# EAGLE board MB_boomer_amp (EAGLE 9.2.0)
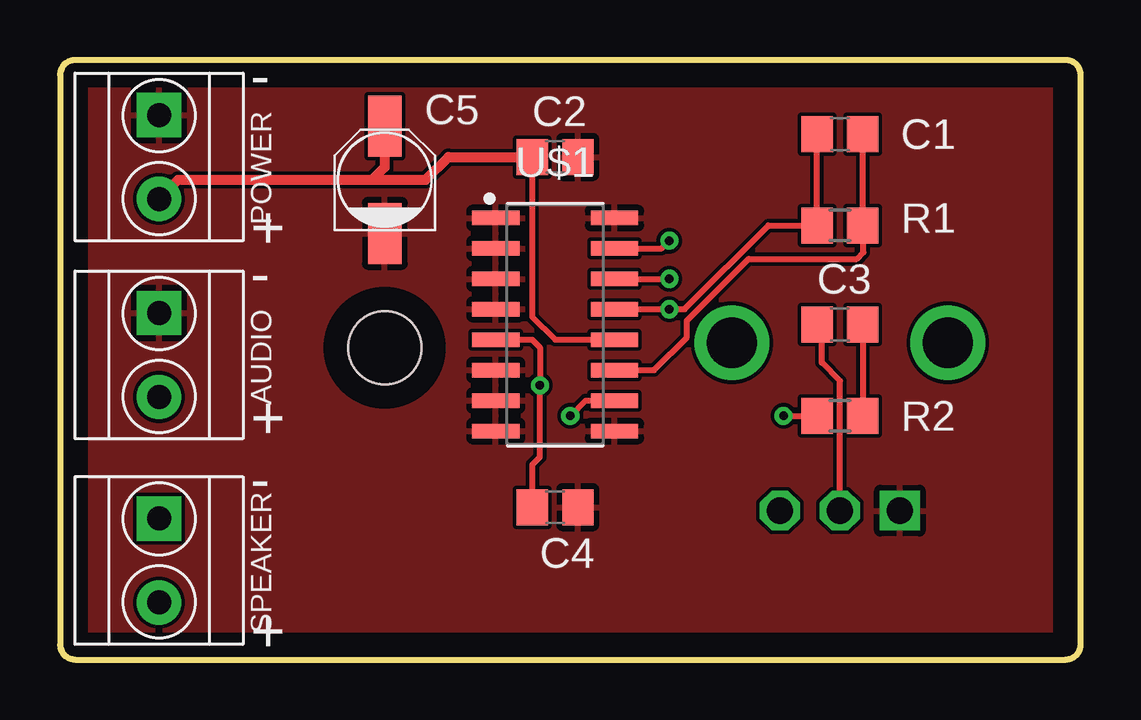
[diagram p0: board, top side]
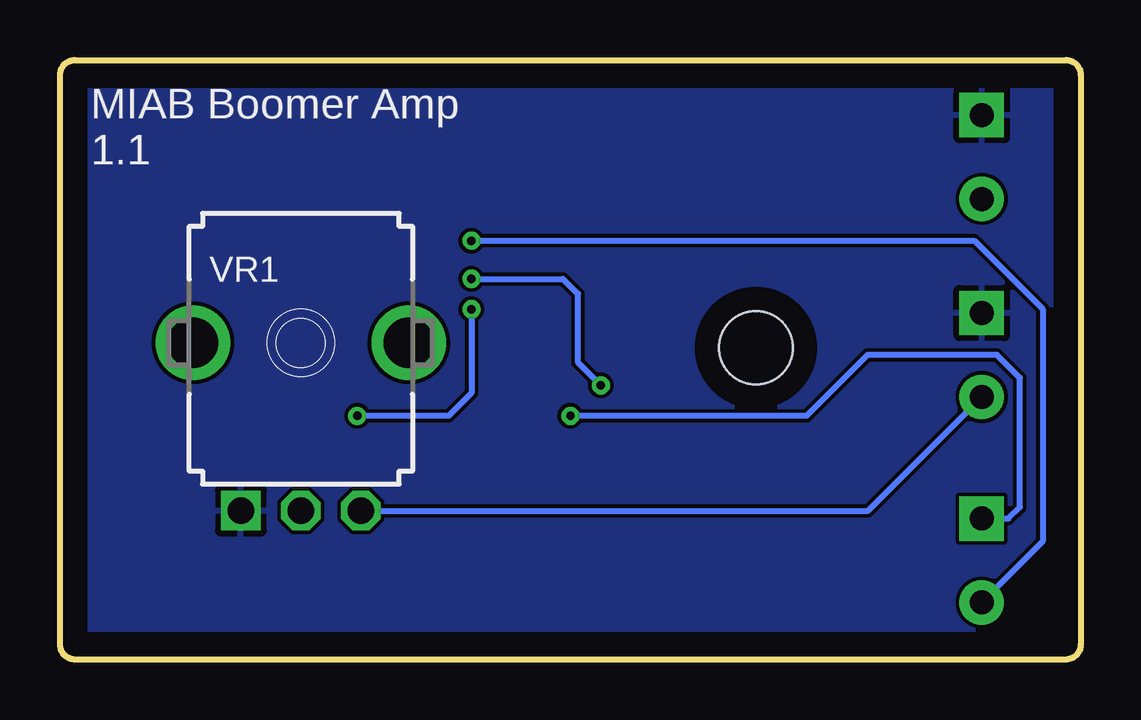
[diagram p1: board, bottom side, seen from below]

Size 42.55 x 25 mm. Coordinates in mm from the lower left corner, seen from the top.
Outline: 0.64,0 41.92,0 arc90 42.55,0.64 42.55,24.36 arc90 41.92,25 0.64,25 arc90 0,24.36 0,0.64 arc90 0.64,0
Copper layers (1*16): Top 0.035mm / dielectric 1.5mm / Bottom 0.035mm
Design rules "default": minimum track width 6mil, minimum drill 0.35mm, track to track 6mil, track to pad 6mil, pad to pad 6mil, via to via 6mil, smd to smd 6mil, copper to edge 40mil, drill to drill 6mil, minimum pad ring 10mil, minimum via ring 8mil, stop-mask expansion 4mil, vias tented up to drill 0mil, thermal gap 10mil
Holes 3.05 mm at 13.54,13

## Footprints (pad centres in the part's own frame; a part is rotated, then mirrored left to right if it is on the bottom)
H2-3.5-7.0X7.0MM = drill 1 pad 1.85 square: 1 -1.75,0 | drill 1 pad 1.85: 2 1.75,0
C0805 = smd 1.3 x 1.5: 1 -0.95,0; 2 0.95,0
PANASONIC_B = smd 2.54 x 1.4: + 2.235,0; - -2.235,0
R0805 = smd 1.3 x 1.5: 1 -0.95,0; 2 0.95,0
SOIC127P600X175-16 = smd 1.968 x 0.602: 1 -2.473,4.445; 2 -2.473,3.175; 3 -2.473,1.905; 4 -2.473,0.635; 5 -2.473,-0.635; 6 -2.473,-1.905; 7 -2.473,-3.175; 8 -2.473,-4.445; 9 2.473,-4.445; 10 2.473,-3.175; 11 2.473,-1.905; 12 2.473,-0.635; 13 2.473,0.635; 14 2.473,1.905; 15 2.473,3.175; 16 2.473,4.445
9MM_SNAP-IN_POT = drill 1.1 square: 1 -2.5,-7 | drill 1.1 octagon: 2 0,-7; 3 2.5,-7 | drill 2.1 pad 2.794: CHASSIS1 -4.5,0; CHASSIS2 4.5,0

## Placement (x,y rotation side)
AUDIO  GREEN-2P-3.5  [H2-3.5-7.0X7.0MM]  4.13,12.7 270 top
C1  5p  [C0805]  32.51,21.91 0 top
C2  100n  [C0805]  20.64,20.95 0 top
C3  4.7u  [C0805]  32.51,13.97 180 top
C4  100n  [C0805]  20.64,6.35 0 top
C5  10u  [PANASONIC_B]  13.54,20 90 top
POWER  GREEN-2P-3.5  [H2-3.5-7.0X7.0MM]  4.13,20.95 270 top
R1  100k  [R0805]  32.51,18.1 180 top
R2  10k  [R0805]  32.51,10.16 0 top
SPEAKER  GREEN-2P-3.5  [H2-3.5-7.0X7.0MM]  4.13,4.13 270 top
U$1  LM4860  [SOIC127P600X175-16]  20.64,13.97 0 top
VR1  [9MM_SNAP-IN_POT]  32.51,13.21 0 bottom

## Library data of the parts
AUDIO POWER SPEAKER = Seeed-Connector
C1-C4 = rcl; SPICEPREFIX: C
C5 = Foxfield
R1 R2 = rcl; SPICEPREFIX: R
U$1 = MIAB
VR1 = MusicThingModular

## Nets
ASIG: AUDIO.2 VR1.3
GND: AUDIO.1 C2.2 C4.2 C5.- POWER.1 U$1.1 U$1.2 U$1.3 U$1.4 U$1.6 U$1.7 U$1.8 U$1.9 U$1.16 VR1.1
N$1: C4.1 U$1.5 U$1.14
N$2: C3.1 R2.2
N$3: C1.1 R1.2 R2.1 U$1.13
N$4: C1.2 R1.1 U$1.11
N$5: C3.2 VR1.2
N$6: SPEAKER.1 U$1.10
N$7: SPEAKER.2 U$1.15
VCC: C2.1 C5.+ POWER.2 U$1.12

## Tracks (layer width: path | path; a pad name or v marks a point on that pad's centre or on a via)
ASIG
  Bottom 0.254: VR1.3 8.87,6.21 AUDIO.2
GND
  pour Top: 50.8,25.08 0.64,25.08 arc90 0,24.45 0,0.64 arc90 0.64,0 50.8,0
  pour Bottom: 0.64,0 50.48,0 50.48,25.08 0.64,25.08 arc90 0,24.45 0,0.64 arc90
N$1  (via drill 0.35)
  Top 0.254: U$1.5 19.68,13.34 20,13.02 v20,11.43 20,8.45 19.69,8.13 C4.1 | U$1.14 v25.4,15.88
  Bottom 0.254: v20,11.43 20.95,12.38 20.95,15.24 21.59,15.88 v25.4,15.88
N$2
  Top 0.254: C3.1 R2.2
N$3  (via drill 0.35)
  Top 0.254: U$1.13 v25.4,14.61 26.04,14.61 29.53,18.1 R1.2 C1.1 | v30.16,10.16 R2.1
  Bottom 0.254: v25.4,14.61 25.4,11.11 26.35,10.16 v30.16,10.16
N$4
  Top 0.254: C1.2 R1.1 33.5,18.06 33.5,16.99 33.21,16.7 28.7,16.7 26.14,14.13 26.14,13.44 24.77,12.06 U$1.11
N$5
  Top 0.254: C3.2 31.75,13.97 31.75,12.38 32.51,11.62 VR1.2
N$6  (via drill 0.35)
  Top 0.254: v21.27,10.16 21.91,10.79 U$1.10
  Bottom 0.254: SPEAKER.1 3.01,5.88 2.54,6.35 2.54,11.75 3.49,12.7 8.89,12.7 11.43,10.16 v21.27,10.16
N$7  (via drill 0.35)
  Top 0.254: U$1.15 25.08,17.14 v25.4,17.46
  Bottom 0.254: v25.4,17.46 4.45,17.46 1.59,14.61 1.59,4.92 SPEAKER.2
VCC
  Top 0.254: U$1.12 20.64,13.34 19.68,14.29 C2.1
  Top 0.406: POWER.2 4.93,20 11.11,20 13.02,20 | C2.1 16.19,20.95 15.24,20 13.02,20 | C5.+ 13.54,20.52 13.02,20

## Text on the board
tNames: - | + | - | + | - | +
bNames: MIAB Boomer Amp / 1.1